# Altium PCB 12v-5v_conventer.PcbDoc
Units mm, origin at the board's own origin, x right, y up, seen from the top; angles counter-clockwise.
Board outline 87.25 x 20.25 mm, 2 copper layers (Top Layer, Bottom Layer), stack 1.671 mm thick; 13 components, 7 nets, 34 pads, 35 vias.
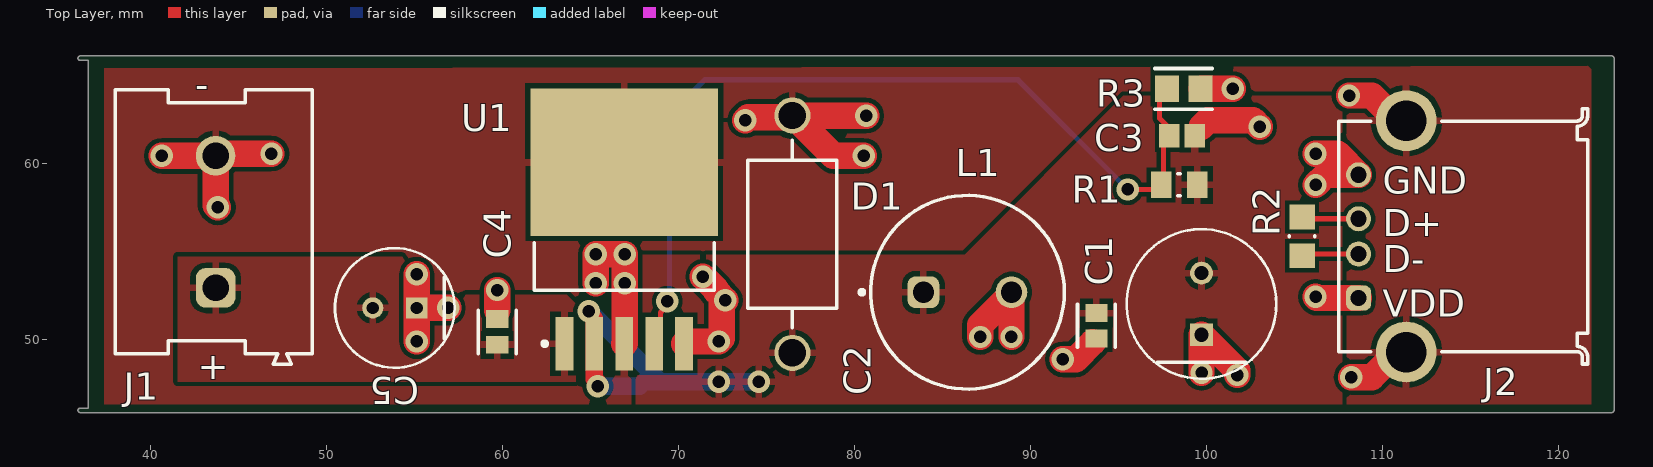
[diagram p0: Top Layer view]
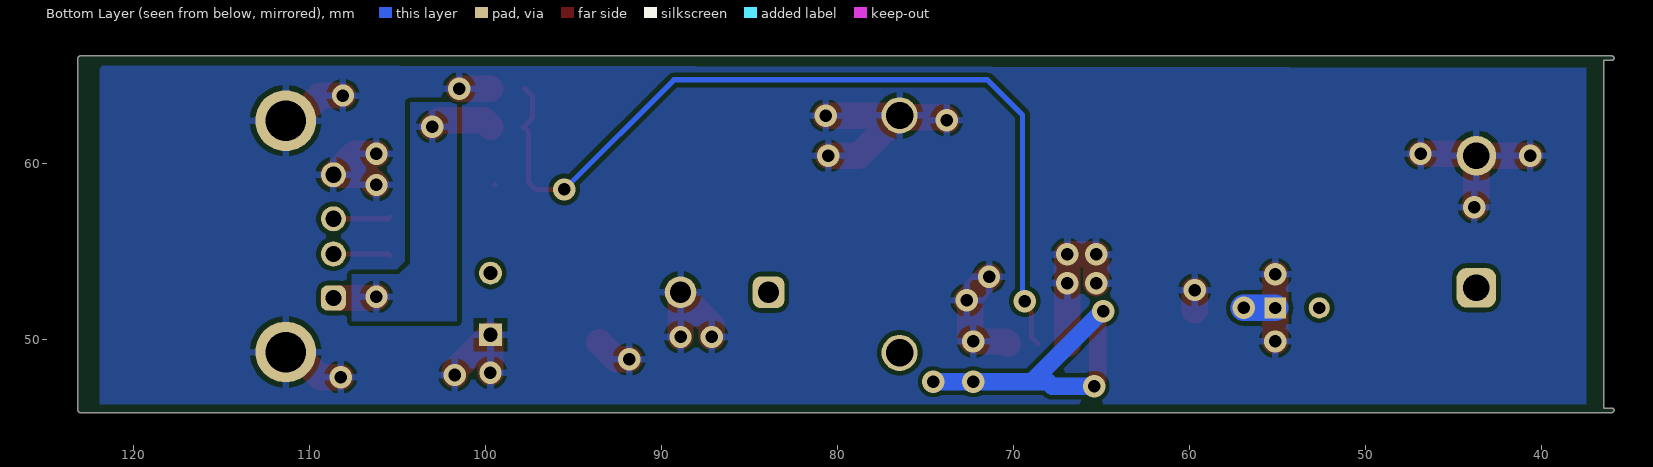
[diagram p1: Bottom Layer view, seen from below]
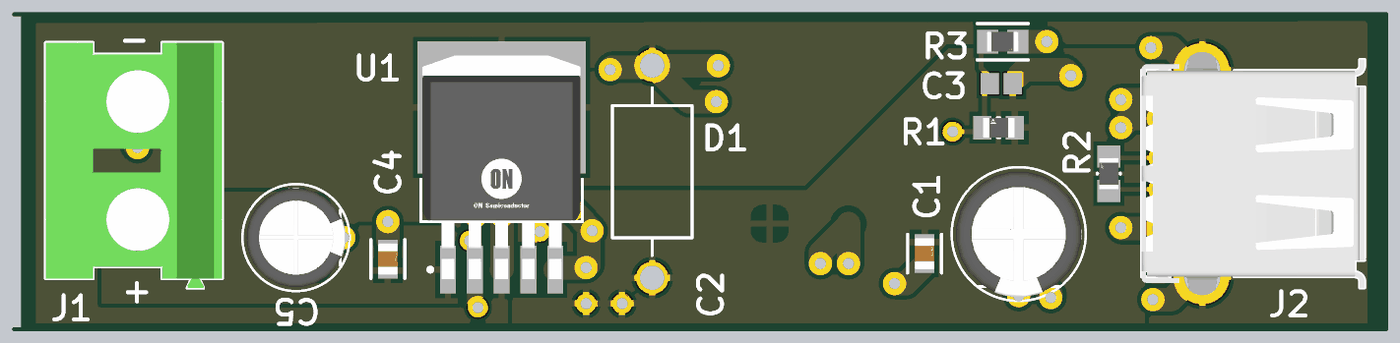
[diagram p2: 3D render of the assembled board from above, using the file's embedded part models]

## Layer stack, top to bottom
Top Solder: solder mask 0.0102, Solder Resist, Dk 3.5
Top Layer: signal copper 0.0356
Dielectric 1: dielectric 1.6, FR-4, Dk 4.8
Bottom Layer: signal copper 0.0356
Bottom Solder: solder mask 0.0102, Solder Resist, Dk 3.5

## Board outline
36,45.873 cw(c36,46) 36,46.127 36.449,46.127 36.449,65.873 36,65.873 cw(c36,66) 36,66.127 123,66.127 cw(c123,66) 123.127,66 123.127,46 cw(c123,46) 123,45.873

## Design rules (kind name [scope] priority, off if disabled: settings)
Clearance [All] p1: gap=0.254 ignorepadtopadclearanceinfootprint=FALSE
MinimumSolderMaskSliver [All] p1: minsoldermaskwidth=0.05
PlaneConnect PolygonConnect_Power [InNet('NetD1_1')] p1: planeconnectstyle=Direct reliefexpansion=0.508 reliefentries=4 reliefconductorwidth=0.254 reliefairgap=0.254
PlaneConnect PlaneConnect_1 [All] p2: planeconnectstyle=Relief reliefexpansion=0.508 reliefentries=4 reliefconductorwidth=0.254 reliefairgap=0.254
PolygonConnect [All] p1: connectstyle=Relief reliefconductorwidth=0.4 reliefentries=4 polygonreliefangle="90 Angle" airgapwidth=0.3
RoutingVias [All] p1: holewidth=0.711 width=1.27 viastyle="Through Hole" minholewidth=0.711 minwidth=1.27 maxholewidth=0.711 maxwidth=1.27
SilkToSolderMaskClearance [IsPad] p1: minsilkscreentomaskgap=0.15 clearancetoexposedcopper=TRUE
SolderMaskExpansion [All] p1: expansion=0.102 istentingtop=FALSE
SupplyNets "Schematic Supply Nets" [InNet('GND')] p1: voltage=0.000
Width [All] p1: maxlimit=1.5 minlimit=0.254 preferedwidth=0.254
27 further rules are at their usual default settings.

## Classes and differential pairs
component class 12v-5v_conventor: C1 C2 C3 C4 C5 D1 J1 J2 L1 R1 R2 U1

## Components (designator, comment, footprint, x,y, rotation, side; value= is the part's Value field where it differs from the comment)
C1 "EEUHD1E221" FP-RAD-TH-D_8_0_5-L_11_5-MFG 99.695,52.042 r90 top
C2 "0805B104K500CT" FP-0805B-IPC_C 93.726,50.8 r90 top
C3 "08051C102KAT4A" CAPC2013X94X50LL20T25 98.589,61.595 r0 top
C4 "0805B104K500CT" FP-0805B-IPC_C 59.69,50.455 r90 top
C5 "EEUHD1E101" FP-RAD-TH-D_6_3_0_5-L_11-MFG 53.868,51.816 r180 top
D1 "1N5822RLG" ONSC-AXIAL_LEAD-2-267-05_V 76.454,56.007 r90 top
J1 "691253910002" 691253910002 43.588,56.709 r90 top
J2 "614004190021" 614004190021 114.554,55.88 r90 top
L1 "7447471330" WE-TIS_1111 1356.4,1322.705 r0 top
R1 "MCU08050D3301BP500" FP-MCU0805-IPC_A 98.425,58.801 r180 top
R2 "HCJ0805ZT0R00" FP-HCJ0805-MFG 105.41,55.88 r90 top
R3 "TFCR0805-10W-E-1001BT" FP-TFCR0805-IPC_A 98.679,64.262 r180 top
U1 "LM2596DSADJG" FP-936A-02-MFG 66.904,56.269 r0 top

## Footprints (in the part's own frame and the unit in brackets; to place one, negate y for a bottom-side part, rotate by r counter-clockwise, add the part's x,y. Pads: shape width x height; smd on the part's side, far side on the other; paste and mask are expansions set on the pad)
614004190021 [mm] "USB 2.0 Type A Horizontal THT"
  rrect50% 1.42x1.42 hole 0.92: 1(-3.5,5.935)
  round 1.42 hole 0.92: 2(-1,5.935) 3(1,5.935) 4(3.5,5.935)
  round 3.45 hole 2.3: Shell(-6.57,3.225) Shell(6.57,3.225)
  silkscreen extent -7.25,-7.08 7.25,7.07, body extent -7.85,-7.07 7.85,7.08, height 7.8
691253910002 [mm] "Serie 2539 - 7.50 mm _ 2 pins"
  rrect50% 2.25x2.25 hole 1.5: 1(-3.75,-0.1)
  round 2.25 hole 1.5: 2(3.75,-0.1)
  silkscreen extent -8.1,-5.6 7.5,5.6, body extent -8.1,-5.6 7.5,5.6, height 18.1
CAPC2013X94X50LL20T25 [mm] "Chip Capacitor, 2-Leads, Body 2.01x1.25mm, IPC High Density"
  rect 1.15x1.35 smd: 1(-0.725,0) 2(0.725,0)
  body extent -1.1,-0.72 1.1,0.72, height 0.94
FP-0805B-IPC_C [mm]
  rect 1.006x1.262 smd paste+0 mask+0: 1(-0.726,0) 2(0.726,0)
  silkscreen extent -1.23,-1.07 1.23,1.07, body extent -1.33,-0.77 1.33,0.77, height 0.25
FP-936A-02-MFG [mm]
  rect 1.016x3.05 smd paste+0 mask+0: 1(-3.404,-6.485) 2(-1.702,-6.485) 3(0,-6.485) 4(1.702,-6.485) 5(3.404,-6.485)
  rect 10.66x8.38 smd paste+0 mask+0: 6(0,3.82)
  silkscreen extent -5.12,-6.61 5.12,-0.74, body extent -5.54,-8.11 5.54,8.11, height 0.25
FP-HCJ0805-MFG [mm]
  rect 1.4x1.44 smd paste+0 mask+0: 1(-1.1,0) 2(1.1,0)
  silkscreen extent -0.03,-0.72 0.03,0.72, body extent -1.9,-0.82 1.9,0.82, height 0.25
FP-MCU0805-IPC_A [mm]
  rect 1.159x1.508 smd paste+0 mask+0: 1(-1.027,0) 2(1.027,0)
  silkscreen extent -0.07,-0.63 0.07,0.63, body extent -2.11,-1.25 2.11,1.25, height 0.25
FP-RAD-TH-D_6_3_0_5-L_11-MFG [mm]
  rect 1.2x1.2 hole 0.7 paste-2539.97 mask+0: 1(-1.25,0)
  round 1.2 hole 0.7 paste-2539.97 mask+0: 2(1.25,0)
  silkscreen extent -3.4,-3.4 3.4,3.4, body extent -3.5,-3.5 3.5,3.5, height 0.25
FP-RAD-TH-D_8_0_5-L_11_5-MFG [mm]
  rect 1.3x1.3 hole 0.8 paste-2539.97 mask+0: 1(-1.75,0)
  round 1.3 hole 0.8 paste-2539.97 mask+0: 2(1.75,0)
  silkscreen extent -4.25,-4.25 4.25,4.25, body extent -4.35,-4.35 4.35,4.35, height 0.25
FP-TFCR0805-IPC_A [mm]
  rect 1.356x1.508 smd paste+0 mask+0: 1(-0.951,0) 2(0.951,0)
  silkscreen extent -1.63,-1.15 1.63,1.15, body extent -2.13,-1.25 2.13,1.25, height 0.25
ONSC-AXIAL_LEAD-2-267-05_V [mm] "AXIAL, 2-Leads, Diameter 5.05mm"
  round 2.05 hole 1.55: 1(-6.745,0) 2(6.745,0)
  silkscreen extent -5.32,-2.52 5.32,2.52
WE-TIS_1111 [mm] "THT Shielded Radial Leaded Wire Wound Inductor, body diameter 11mm"
  rrect50% 1.8x1.8 hole 1.2: 1(-1272.5,-1270)
  round 1.8 hole 1.2: 2(-1267.5,-1270)
  silkscreen extent -1276.12,-1275.5 -1264.5,-1264.5, body extent -1275.3,-1275.3 -1264.7,-1264.7, height 10.6

## Part data
C1: library part CMP-05427-001200-1, "Aluminum Electrolytic Capacitors (Radial Lead Type) AEC-Q200 Qualified 220uF ±20% 25V", Capacitance=220uF, Case/Package=Radial, Max Operating Temperature=105°C, Min Operating Temperature=-55°C, Package Quantity=200, Ripple Current=230mA, Tolerance=20%, Voltage=25V, Construction=RADIAL, Contact Plating=Tin, Diameter=8mm, Height=11.5mm, Height - Seated (Max)=0.512inch, Lead Diameter=0.6mm, Lead Pitch=3.5mm, Lead/Base Style=Straight, Length=11.5mm, Life (Hours)=1000Hour, Mount="Through Hole", Number of Pins=2, Packaging=Bulk, Polarity=Polar, REACH SVHC="No SVHC", Ripple Current (AC)=230mA, RoHS Compliant=Yes, Series=HD, Termination=Radial, Voltage Rating=25V, Voltage Rating (DC)=25V
C2 C4: library part CMP-45632-000003-1, "CAP CER 0.1UF 50V X7R 0805", Capacitance=100nF, Case Code (Imperial)=0805, Case Code (Metric)=2012, Dielectric=X7R, Max Operating Temperature=125°C, Min Operating Temperature=-55°C, Tolerance=10%, Voltage=50V, Case/Package=0805, Depth=1.25mm, Lead Free="Lead Free", Length=2mm, Packaging="Tape and Reel", Radiation Hardening=No, RoHS Compliant=Yes, Voltage Rating=50V, Voltage Rating (DC)=50V
C3: library part CMP-2007-04160-1, Manufacturer="AVX Interconnect / Elco", Part Number=08051C102KAT4A
C5: library part CMP-05427-000916-1, "Aluminum Electrolytic Capacitors (Radial Lead Type) AEC-Q200 Qualified 100uF ±20% 25V", Capacitance=100uF, Case/Package=Radial, Max Operating Temperature=105°C, Min Operating Temperature=-55°C, Package Quantity=200, Ripple Current=130mA, Tolerance=20%, Voltage=25V, Construction=RADIAL, Diameter=6.3mm, Height=11.2mm, Height - Seated (Max)=0.5inch, Lead Diameter=0.5mm, Lead Pitch=2.5mm, Lead/Base Style=Straight, Length=11.2mm, Life (Hours)=1000Hour, Mount="Through Hole", Number of Pins=2, Packaging=Bulk, Polarity=Polar, Radiation Hardening=No, REACH SVHC="No SVHC", Ripple Current (AC)=130mA, RoHS Compliant=Yes, Series="Automotive, AEC-Q200, HD", Termination=Radial, Voltage Rating=25V, Voltage Rating (DC)=25V
D1: library part CMP-1055-00010-1, "Rectifier, 2-Pin Axial_Lead, Pb-Free, Tape and Reel", Manufacturer="On Semiconductor", ComponentLink1Description="Manufacturer URL", ComponentLink1URL=http://www.onsemi.com/, ComponentLink2Description=Datasheet, ComponentLink2URL=http://www.onsemi.cn/pub_link/Collateral/1N5820-D.PDF, ComponentLink3Description="Package Specification", ComponentLink3URL=http://www.onsemi.com/pub_link/Collateral/267-05.PDF, Configuration=Single, DatasheetVersion="Rev. 10", IFSM Max (A)=80, Mounting Technology="Through Hole", PackageDescription="2-Pin, Axial Lead, Diameter 5.05 mm", PackageReference=AXIAL_LEAD-2-267-05, PackageVersion="Rev. G, 06/2000", Packing="Tape and Reel", PartNumber=1N5822RLG, RoHS=TRUE
J1: library part CMP-1502-02712-3, "Terminal Block, 7.5MM Pitch, Horizontal, Rising Cage Clamp, 12-30 AWG, 2 Pin"
J2: library part CMP-1502-03228-3, "USB Connector, 2.0 TYPE A, RECEPTACLE, THT; Connector Type: USB Type A; Standard: USB 2.0; Gender: Receptacle; No. of...", Contact Resistance=30mΩ, Current Rating=3A, Housing Color=White, Insulation Resistance=1GΩ, Max Operating Temperature=85°C, Min Operating Temperature=-40°C, Operating Supply Voltage=30V, Connector Type=USB, Contact Material=Brass, Contact Plating=Gold, Gender=Receptacle, Insulation Material=PBT, Mount="Horizontal, Through Hole", Number of Contacts=4, Number of Pins=4, Orientation=Horizontal, REACH SVHC=No, RoHS=Compliant, USB Standard="USB 2.0"
L1: library part CMP-1406-00003-3, "Inductor Power Shielded Wirewound 33uH 20% 1KHz Ferrite 3.6A 61mOhm DCR RDL Tray", Ambient Temperature Range High=85°C, Ambient Temperature Range Low=-40°C, Case/Package=Radial, Current Rating=3A, DC Resistance (DCR)=57mΩ, Frequency=10MHz, Inductance=33µH, Inductance Tolerance=20%, Max DC Current=3.6A, Max Operating Temperature=125°C, Saturation Current=2.8A, Series Resistance=50mΩ, Test Frequency=1kHz, Core Material=Ferrite, Diameter=11mm, Features=Shielded, Height=11.5mm, Lead Diameter=650µm, Lead Pitch=5mm, Length=11mm, Min Operating Temperature=-40°C, Mount="Radial, Through Hole", Number of Pins=2, REACH SVHC=Unknown, RMS Current (Irms)=3.6A, RoHS=Compliant, Self Resonant Frequency=10MHz, Shielding=Shielded, Tolerance=20%, Width=11mm
R1: library part CMP-02407-010614-1, "RES 1.05K OHM 0.5% 1/5W 0805", Case/Package=0805, Max Operating Temperature=125°C, Max Power Dissipation=125mW, Min Operating Temperature=-55°C, Package Quantity=5000, Resistance=3.3kR, Temperature Coefficient=25ppm/°C, Tolerance=0.1%, Composition="Thin Film", Depth=1.25mm, Height=0.022inch, Lead Free="Lead Free", Length=0.079inch, Military Standard=Not, Number of Terminations=2, Packaging="Tape and Reel", Width=0.049inch
R2: library part CMP-26527-000104-1, "RES 0 OHM JUMPER 1/2W 0805", Case Code (Imperial)=0805, Case Code (Metric)=2012, Max Operating Temperature=155°C, Min Operating Temperature=-55°C, Package Quantity=1, Resistance=0mR, Case/Package=0805, Height=0.026inch, Lead Free="Lead Free", Length=0.079inch, Mount="Surface Mount", Number of Terminations=2, Packaging="Tape and Reel", Radiation Hardening=No, RoHS Compliant=Yes, Termination=Wraparound, Width=0.049inch
R3: library part CMP-250906-148809-1, "RES Thin Film,  1kΩ, 0.1%, 0.1W, 25ppm/°C, 0805"
U1: library part CMP-07129-000001-1, "IC REG MULT CONFG ADJ 3A D2PAK-5", Manufacturer="ON Semiconductor", Max Junction Temp=+125°C, Max Supply Voltage=40V, Min Supply Voltage=4.5V, Negative Voltage Available=true, Nominal Supply Current=5mA, Output Current=3A, Output Voltage=1.23-37V, Package=936A-02, Switching Frequency=150Hz, Temperature="-40°C to +125°C", Temperature Range Low=-40°C, Automotive=No, Category=IC, ComponentLink2Description=Datasheet, ComponentLink2URL=https://www.onsemi.com/pub/Collateral/LM2596-D.PDF, Device Class L1="Integrated Circuits (ICs)", Device Class L2="Power Management ICs", Device Class L3="Voltage Regulators - Switching", Digikey Description="IC REG MULT CONFG ADJ 3A D2PAK-5", Footprint Url=https://www.onsemi.com/pub/Collateral/936A-02.PDF, Height=4.826mm, Lead Free=Yes, Manufacturer Part Number=LM2596DSADJG, Max Duty Cycle=95%, Mouser Description="Voltage Regulators - Switching Regulators 3A BUCK SWCH 150KHZ", Number Of Outputs=1, Octopart=https://octopart.com/lm2596dsadjg-on+semiconductor-12437034, Output Type=AdjustableProgrammable, RoHS=TRUE, Standoff Height=0mm, Switching Topology=Boost,Buck,Buck-Boost, Temperature Range High=+125°C

## Via types
v1: diameter 1.27, hole 0.711, Top Layer to Bottom Layer, 35 vias

## Nets (pads, with @x,y where several pads share a name; then routed paths per layer and width w, separated by ;. In a path a pad name is that pad's centre, name@x,y a point inside that pad or via, vN(x,y) a via of type N, cw(c..) or ccw(c..) an arc to the next point about the centre after c; other vN are vias at no path point)
GND: C1.1 C2.1 C4.2 C5.1 D1.2 J1.2 J2.4 J2.Shell L1.2 R3.1 U1.3 U1.5 U1.6 | length 72.6
  Top Layer w1.5: v1(40.64,60.452) 43.681,60.452 J1.2 ; v1(43.815,57.531) 43.688,57.658 J1.2 ; v1(46.863,60.579) 43.808,60.579 J1.2 ; v1(55.118,49.911) C5.1 ; v1(55.118,53.721) C5.1 ; v1(56.896,51.816) C5.1 ; 59.69,51.689 v1(59.69,52.832) ; v1(65.278,53.213) v1(65.278,54.864) v1(66.929,54.864) v1(66.929,53.213) 66.929,49.809 U1.3 ; U1.5 70.435,49.911 v1(72.263,49.911) 72.444,50.092 72.444,52.051 v1(72.644,52.251) 72.136,52.759 72.136,52.832 v1(71.374,53.594) ; v1(73.787,62.484) 73.95,62.647 76.349,62.647 D1.2 ; v1(80.518,60.452) 78.786,60.452 76.486,62.752 D1.2 ; v1(80.645,62.738) 76.468,62.738 D1.2 ; v1(87.122,50.165) 87.122,50.846 L1.2@88.9,52.624 ; v1(88.9,50.165) L1.2@88.9,52.624 ; L1.2 L1.2@88.9,52.624 ; v1(91.821,48.895) 92.547,48.895 C2.1@93.518,49.865 ; v1(99.695,48.133) C1.1 101.727,48.26 v1(101.727,48.006) ; R3.1@99.702,64.266 v1(101.477,64.266) ; v1(106.172,58.801) 106.751,59.38 J2.4 107.42,60.579 v1(106.172,60.579) ; v1(108.077,63.881) 109.37,63.881 110.801,62.45 J2.Shell@111.329,62.45 ; v1(108.204,47.879) 109.37,47.879 110.801,49.31 J2.Shell@111.329,49.31
  Bottom Layer w1.5: C5.1 v1(56.896,51.816)
NetC1_2: 
NetC3_1: C3.1 R1.2 R3.2 U1.4 | length 50.8
  Top Layer w0.3: U1.4 68.964,50.142 68.964,51.557 69.342,51.935 v1(69.342,52.197) ; v1(95.504,58.547) 97.144,58.547 R1.2 97.536,58.939 97.536,61.832 97.78,62.076 97.827,62.076 97.31,62.593 97.31,63.844 R3.2
  Bottom Layer w0.3: v1(69.342,52.197) 69.469,52.324 69.469,62.777 71.462,64.77 89.281,64.77 v1(95.504,58.547)
NetC4_1: C4.1 C5.2 J1.1 U1.1
NetD1_1: C1.2 C2.2 C3.2 D1.1 J2.1 L1.1 R1.1 U1.2 | length 25.5
  Top Layer w0.3: R1.1@99.441,58.812 R1.1
  Top Layer w1: v1(64.88,51.623) 64.88,51.55 65.194,51.236 65.194,49.792 65.21,49.776 65.21,47.766 65.353,47.623 65.353,47.423 v1(65.405,47.371)
  Top Layer w1.5: C3.2@99.695,62.103 100.076,62.484 102.616,62.484 v1(102.997,62.103) ; v1(106.172,52.451) 106.243,52.38 J2.1
  Bottom Layer w1: v1(64.88,51.623) 64.948,51.623 68.883,47.688 68.897,47.688 ; v1(65.405,47.371) 67.786,47.371 68.04,47.625 68.897,47.625 v1(72.263,47.625) v1(74.549,47.625)
NetJ2_2: J2.2 R2.1 | length 3.3
  Top Layer w0.3: R2.1 105.51,54.88 J2.2
NetJ2_3: J2.3 R2.2 | length 3.3
  Top Layer w0.3: R2.2 105.51,56.88 J2.3

## Polygon pours and split planes (outlines as drawn)
GND on Top Layer "GND_L01_P008" (solid, pour order 8): 37.378,65.432 37.378,46.355 121.827,46.355 121.827,65.559
NetD1_1 on Top Layer "NETD1_1_L01_P005" (solid, pour order 5): 67.564,51.155 67.564,46.355 107.696,46.355 107.696,63.855 95.25,63.855 86.233,54.838 67.564,54.838
NetC4_1 on Top Layer "NETC4_1_L01_P000" (solid, pour order 0): 41.529,54.737 41.529,47.625 64.135,47.625 64.135,52.07 63.627,52.578 56.642,52.578 54.483,54.737
GND on Bottom Layer "GND_L02_P009" (solid, pour order 9): 37.442,65.469 37.442,46.355 121.897,46.355 121.897,65.596
NetD1_1 on Bottom Layer "NETD1_1_L02_P007" (solid, pour order 7): 101.6,63.5 101.6,51.054 107.569,51.054 107.569,53.721 104.902,53.721 104.267,54.356 104.267,63.5

## Silkscreen, mask and mechanical layers (free items; w line width, h text height)
Top Overlay:
  text "-" at 42.545,63.754 h1.52
  text "GND" at 109.982,58.293 h1.52
  text "D+" at 109.982,55.88 h1.52
  text "D-" at 109.982,53.848 h1.52
  text "VDD" at 109.982,51.308 h1.52
  text "+" at 42.672,47.752 h1.52
Mechanical 1:
  lines w0.254: 36.576,66 36.576,45.974 123,45.974 123,66 36.703,66